# Altium PCB Kocka_BDD.PcbDoc
Units mm, origin at the board's own origin, x right, y up, seen from the top; angles counter-clockwise.
Board outline 50 x 50 mm, 2 copper layers (Top Layer, Bottom Layer); 24 components, 42 nets, 109 pads, 51 vias.
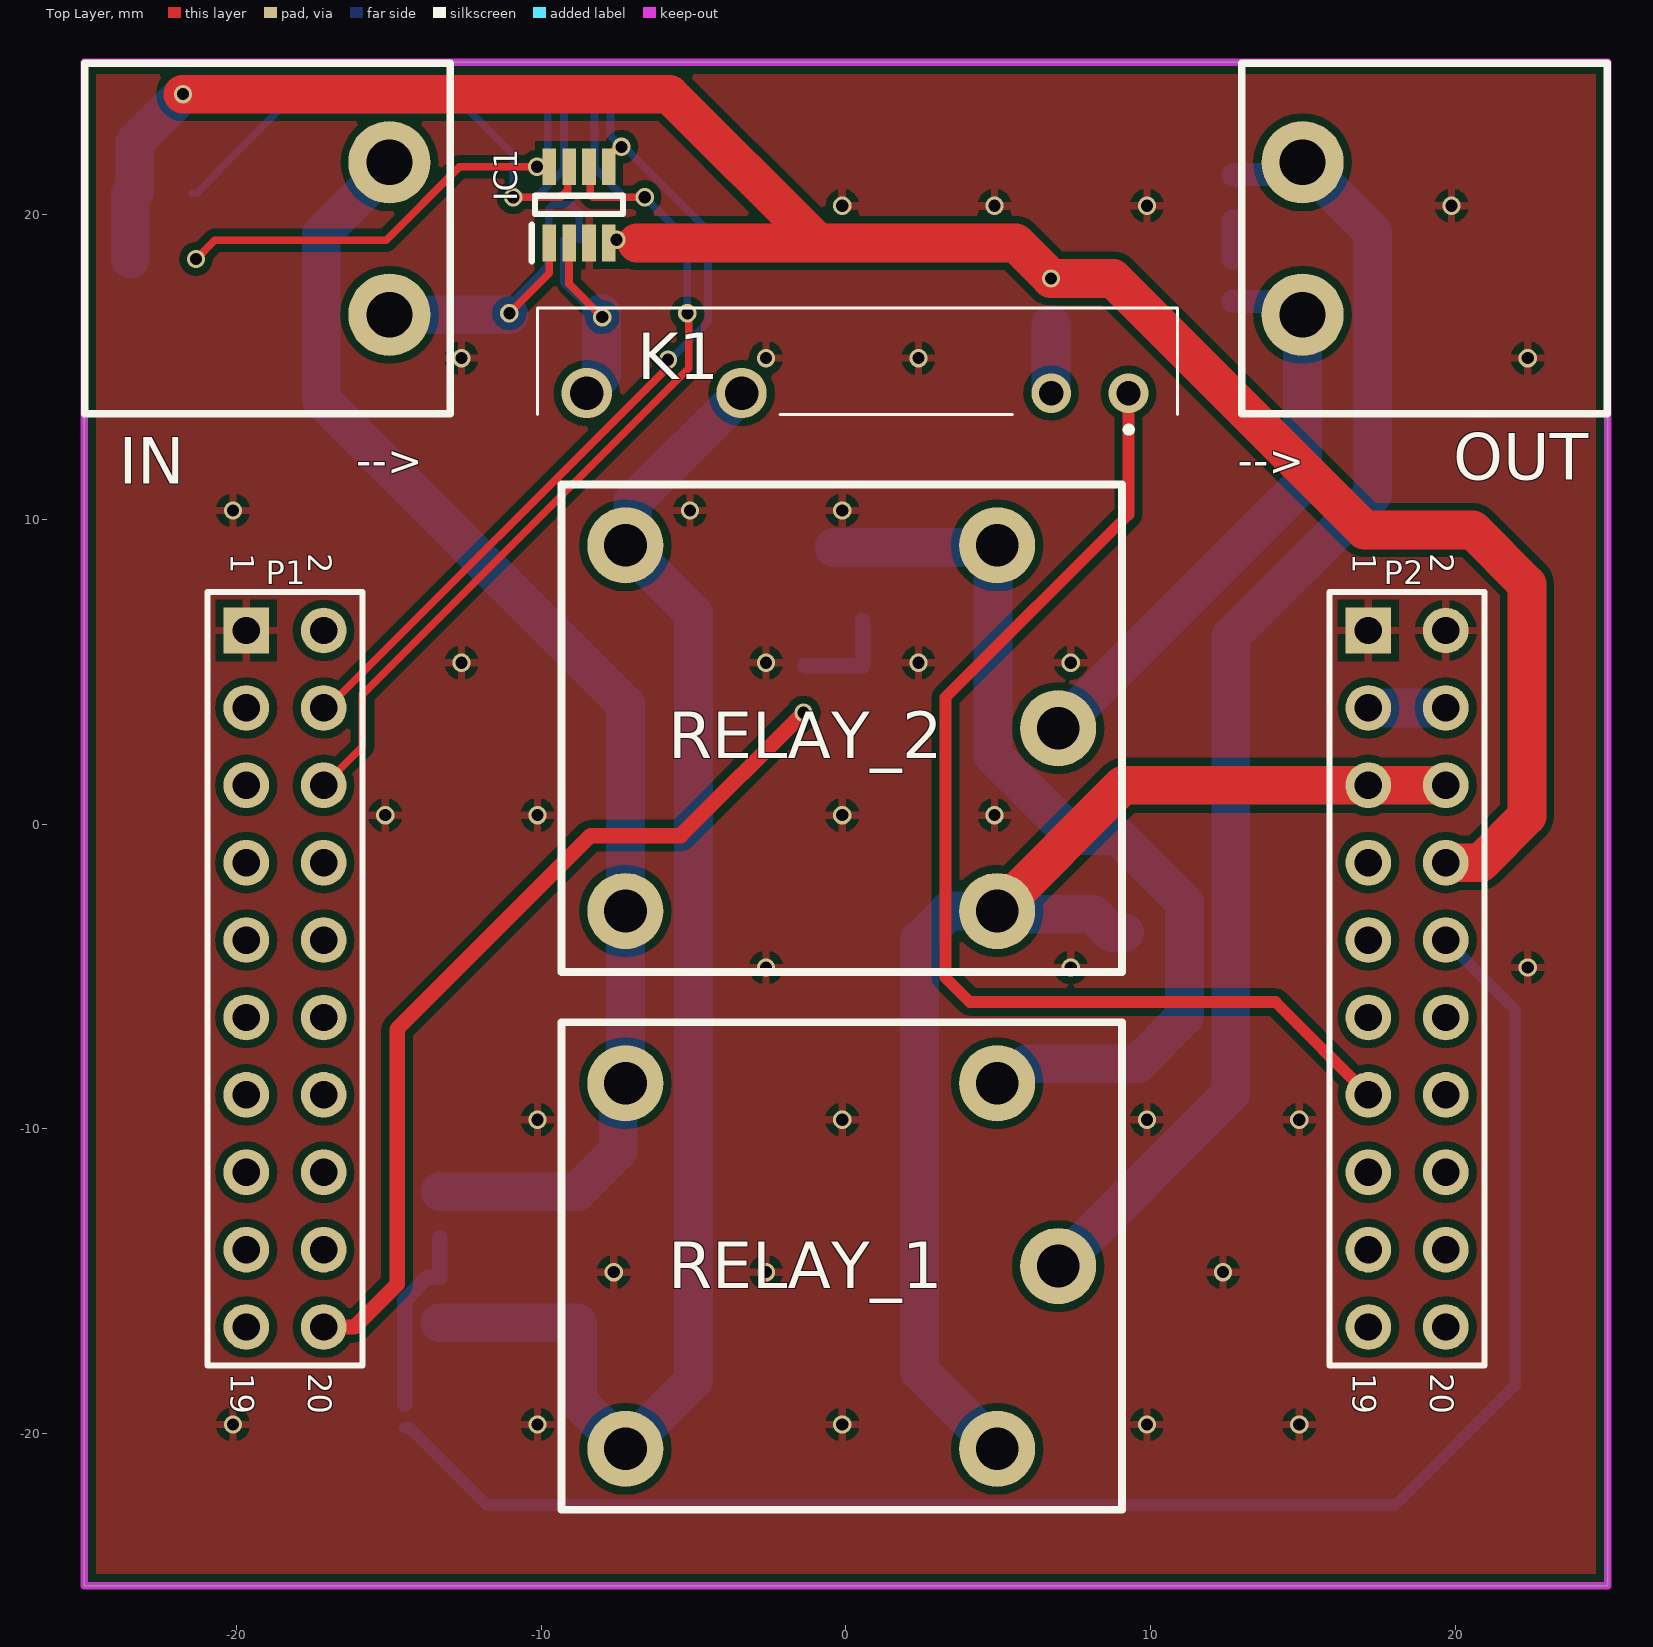
[diagram p0: Top Layer view]
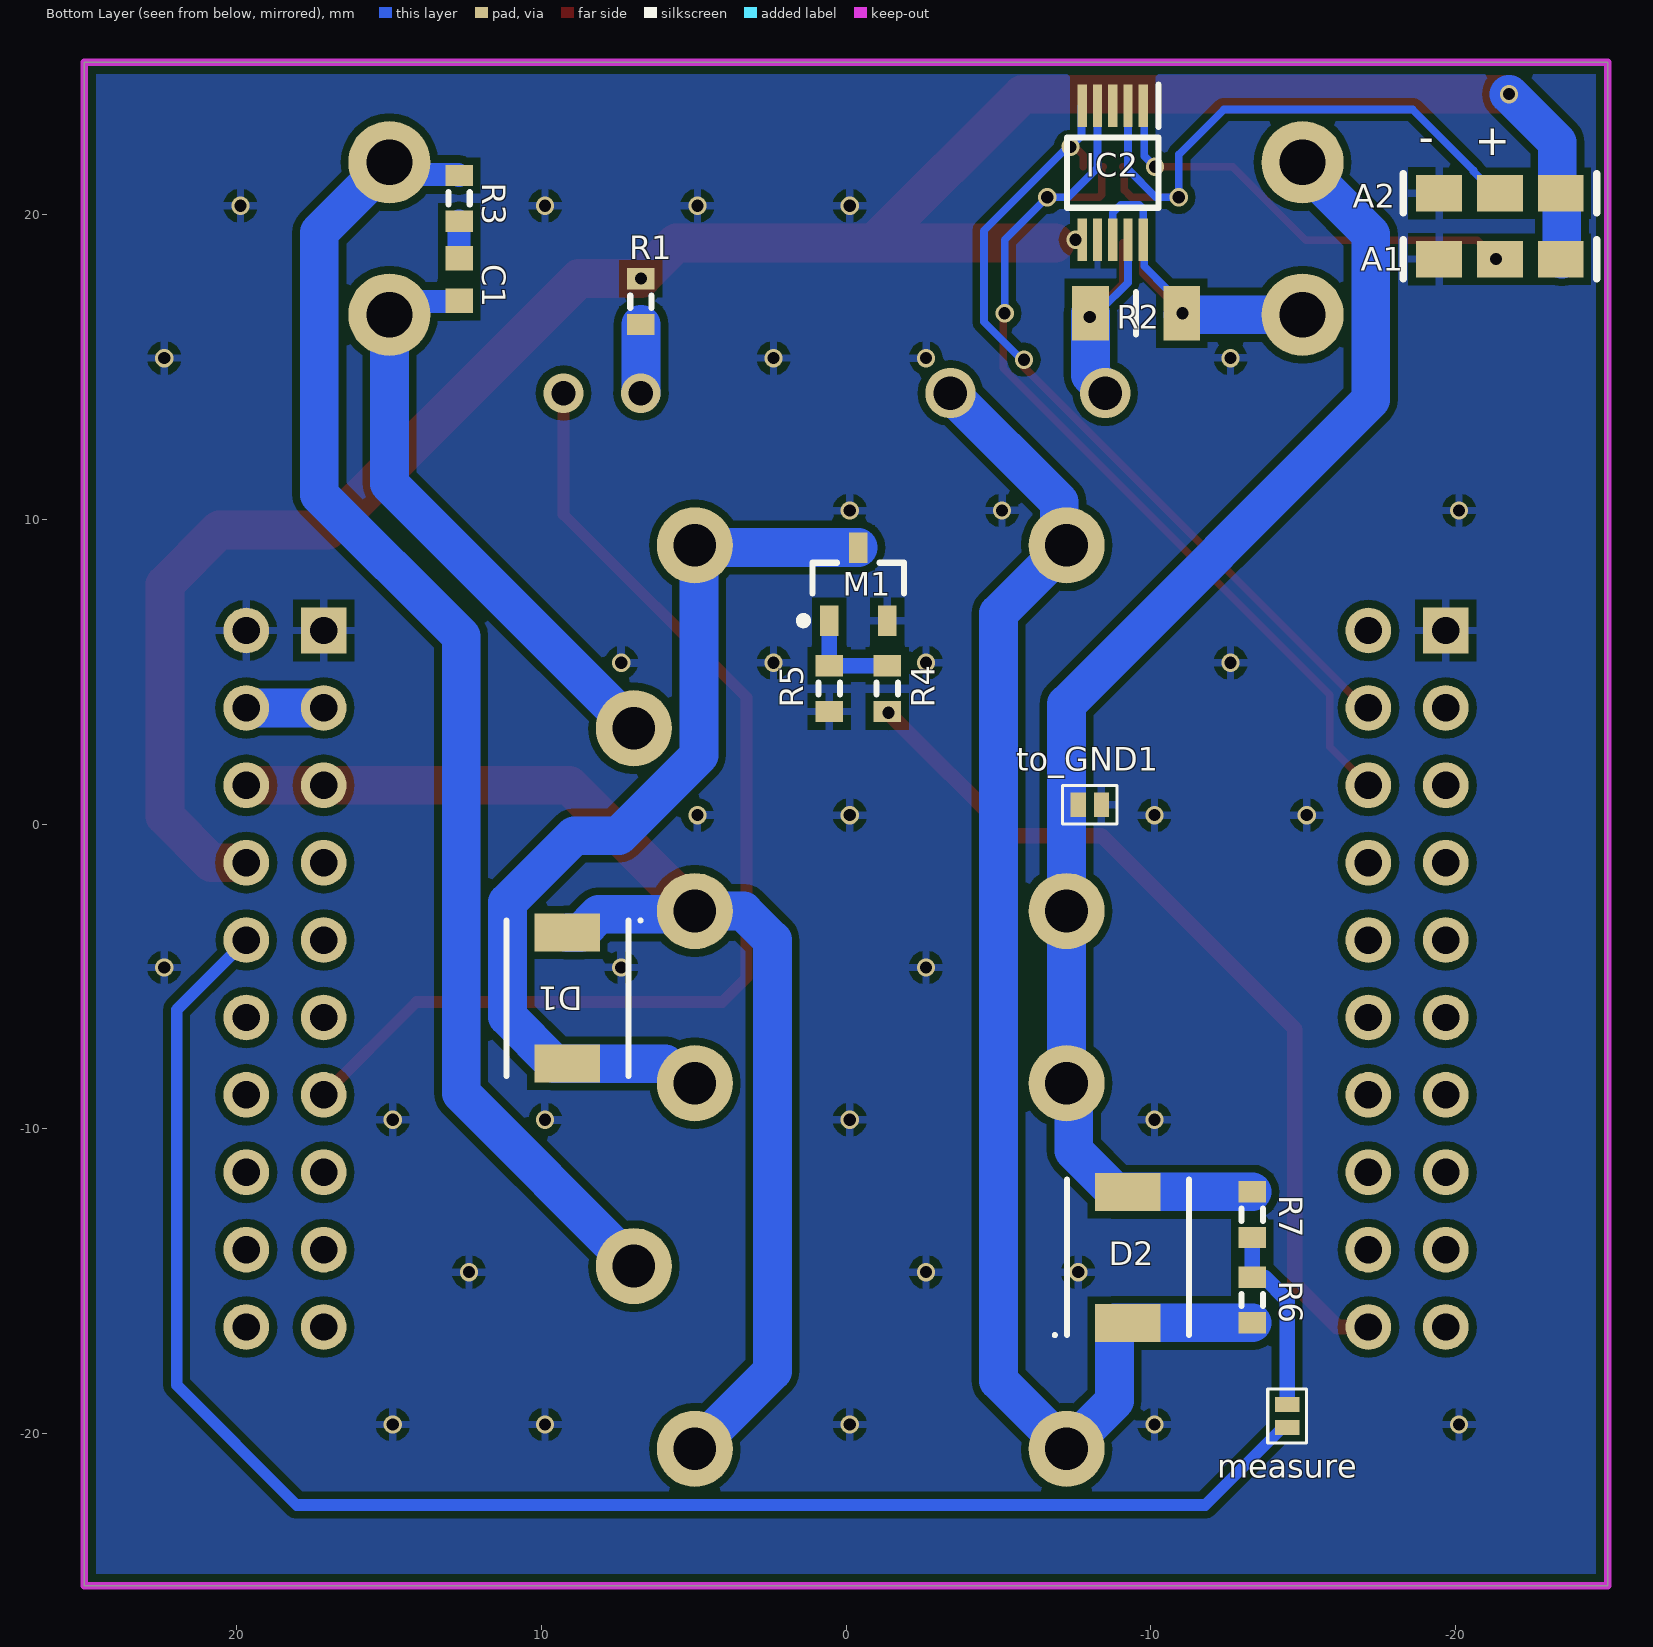
[diagram p1: Bottom Layer view, seen from below]
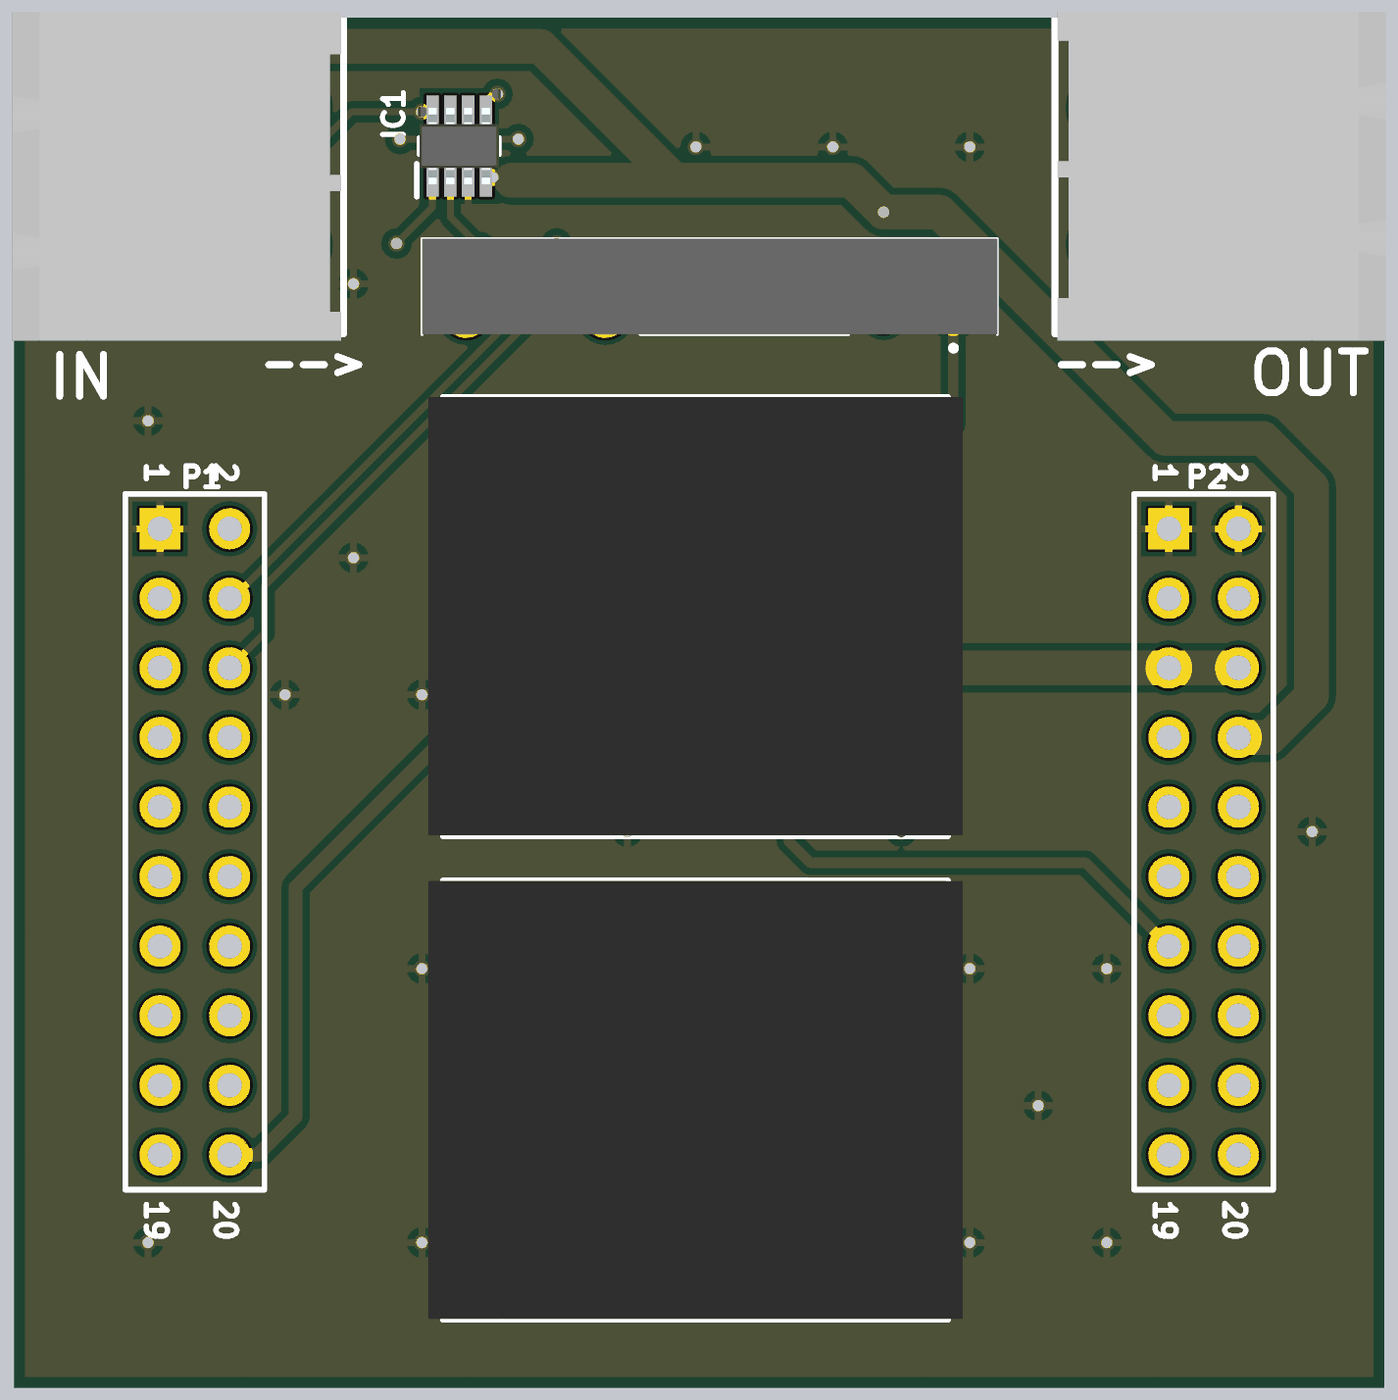
[diagram p2: 3D render of the assembled board from above, using the file's embedded part models]

## Layer stack, top to bottom
Top Solder: solder mask 0.0102, Solder Resist, Dk 3.5
Top Layer: signal copper 0.0356
Dielectric 1: dielectric 0.32, FR-4, Dk 4.8
Bottom Layer: signal copper 0.0356
Bottom Solder: solder mask 0.0102, Solder Resist, Dk 3.5

## Board outline
-25,-25 25,-25 25,25 -25,25

## Design rules (kind name [scope] priority, off if disabled: settings)
Clearance [All] p1: gap=0.254 ignorepadtopadclearanceinfootprint=TRUE except(0: Arc-Hole Track-Hole SMDPad-Hole THPad-Hole Via-Hole Fill-Hole Poly-Hole Region-Hole Text-Hole; 0.127: Arc-Arc Arc-Track Track-Track SMDPad-SMDPad; 0.2: Arc-SMDPad Arc-THPad Track-SMDPad Track-THPad)
HoleSize [All] p1: absolutevalues=TRUE maxlimit=10 minlimit=0.2 maxpercent=80.000 minpercent=20.000
PolygonConnect [All] p1: connectstyle=Relief reliefconductorwidth=0.254 reliefentries=4 polygonreliefangle="90 Angle" airgapwidth=0.254
RoutingVias [All] p1: holewidth=0.4 width=0.6 viastyle="Through Hole" minholewidth=0.2 minwidth=0.4 maxholewidth=6 maxwidth=10
SolderMaskExpansion [All] p1: expansion=0.102
Width [All] p1: maxlimit=12.7 minlimit=0.089 preferedwidth=0.254
29 further rules are at their usual default settings.

## Classes and differential pairs
component class Meranie: A1 A2 IC1 IC2 R2
component class "Duty cycle SSR": K1 K? R1
component class Kocka_BDD: IN OUT P1 P2
component class "Zmena polarity": C1 D1 D2 K? M1 measure R3 R4 R5 R6 R7 RELAY_1 RELAY_2 to_GND1

## Components (designator, comment, footprint, x,y, rotation, side; value= is the part's Value field where it differs from the comment)
A1 "ADR_PAD" SOLDER_PAD -21.463,18.542 r90 bottom
A2 "ADR_PAD" SOLDER_PAD -21.463,20.701 r90 bottom
C1 "100nF" 1608[0603] 12.7,17.87 r270 bottom value=100pF
D1 "SK52-DIO" D5A20V 9.144,-5.715 r270 bottom
D2 "SS14" D5A20V -9.255,-14.224 r90 bottom
IC1 "INA219AIDCNR" SOT65P280X145-8N -8.763,20.32 r90 top
IC2 "INA226AIDGSR" SOP50P490X110-10N -8.755,21.377 r270 bottom
IN "B+,A-" CON_2CH_PLUG -14.986,19.217 r270 top
K1 "AQZ102" AQZ102 0.381,16.944 r180 top
M1 "NMOS" SOT23 -0.402,7.874 r90 bottom
measure "JMP" JMP -14.478,-19.431 r270 bottom
OUT "B+,A-" CON_2CH_PLUG 14.986,19.217 r90 top
P1 "Header 10X2" HDR2X10 -19.685,6.35 r270 top
P2 "Header 10X2" HDR2X10 17.145,6.35 r270 top
R1 "220 Ohm" J1-0603 6.731,17.145 r270 bottom value=10K
R2 "2mOhm" RESC3216X75N -9.525,16.764 r180 bottom
R3 "15R" J1-0603 12.7,20.537 r270 bottom value=2R
R4 "5R" J1-0603 -1.352,4.445 r90 bottom value=200K
R5 "100K" J1-0603 0.548,4.445 r270 bottom value=200K
R6 "100K" J1-0603 -13.335,-15.624 r90 bottom value=200K
R7 "8K" J1-0603 -13.335,-12.824 r90 bottom value=200K
RELAY_1 "RELAY_DC" RELAY_DC 6.961,-14.509 r180 top
RELAY_2 "RELAY_DC" RELAY_DC 6.961,3.144 r180 top
to_GND1 "JMP" JMP -8.001,0.635 r180 bottom

## Footprints (in the part's own frame and the unit in brackets; to place one, negate y for a bottom-side part, rotate by r counter-clockwise, add the part's x,y. Pads: shape width x height; smd on the part's side, far side on the other; paste and mask are expansions set on the pad)
1608[0603] [mm] "Chip Capacitor, Body 1.6x0.8mm, IPC High Density"
  rect 0.8x0.9 smd: 1(-0.7,0) 2(0.7,0)
  body extent -0.87,-0.48 0.87,0.48, height 1.3
AQZ102 [mm]
  round 1.3 hole 0.8: 1(-8.89,2.8) 2(-6.35,2.8)
  round 1.65 hole 1.1: 3(3.81,2.8) 4(8.89,2.8)
  silkscreen extent -10.5,0 10.5,4.1, body extent -10.5,0 10.5,3.5, height 11.1
CON_2CH_PLUG [mm] "TBG-5.0-KW-2P"
  round 2.7 hole 1.5: 1(-2.5,0) 2(2.5,0)
  silkscreen extent -5.75,-10 5.75,2, body extent -6,-10.09 6,1.91, height 8.5
D5A20V [mm] "Schottky 5A 20V"
  rect 1.25x2.15 smd: 1(-2.15,0) 2(2.15,0)
  silkscreen extent -2.6,-2 2.55,2.45, body extent -2.7,-2 2.7,2, height 2.4
HDR2X10 [mm] "Connector; Header; 10x2 Position"
  rect 1.5x1.5 hole 0.9: 1(0,0)
  round 1.5 hole 0.9: 2(0,2.54) 3(2.54,0) 4(2.54,2.54) 5(5.08,0) 6(5.08,2.54) 7(7.62,0) 8(7.62,2.54) 9(10.16,0) 10(10.16,2.54) 11(12.7,0) 12(12.7,2.54) 13(15.24,0) 14(15.24,2.54) 15(17.78,0) 16(17.78,2.54) 17(20.32,0) 18(20.32,2.54) 19(22.86,0) 20(22.86,2.54)
  silkscreen extent -1.27,-1.27 24.13,3.81
J1-0603 [mm] "Chip Resistor, Body 1.6x0.8mm, IPC High Density"
  rect 0.7x0.9 smd: 1(-0.75,0) 2(0.75,0)
  silkscreen extent -0.2,-0.35 0.2,0.35, body extent -0.85,-0.48 0.85,0.48, height 0.9
JMP [mm] "Jumper_solder"
  rect 0.5x0.8 smd: 1(-0.381,0) 2(0.381,0)
  silkscreen extent -0.89,-0.64 0.89,0.64
RELAY_DC [mm] "RM51-3011-85-1005"
  round 2.5 hole 1.4: 1(0,0) 2(2,6) 3(14.2,6) 4(14.2,-6) 5(2,-6)
  silkscreen extent -2.1,-8 16.3,8, body extent -2.65,-8.01 16.85,7.99, height 17.5
RESC3216X75N [mm]
  rect 1.2x1.8 smd: 1(-1.5,0) 2(1.5,0)
  silkscreen extent 0,-0.7 0,0.7, body extent -1.6,-0.8 1.6,0.8, height 0.75
SOLDER_PAD [mm]
  rect 1.2x1.5 smd: 1(0,2) 2(0,0) 3(0,-2)
  silkscreen extent -0.64,-3.17 0.64,3.17
SOP50P490X110-10N [mm]
  rect 1.4x0.3 smd: 1(-2.2,1) 2(-2.2,0.5) 3(-2.2,0) 4(-2.2,-0.5) 5(-2.2,-1) 6(2.2,-1) 7(2.2,-0.5) 8(2.2,0) 9(2.2,0.5) 10(2.2,1)
  silkscreen extent -2.9,-1.5 1.15,1.5, body extent -2.45,-1.5 2.45,1.5, height 1.1
SOT23 [mm] "SOT23, 3-Leads, Body 2,56x2,37mm, Pitch 0,95mm, IPC Medium Density"
  rect 1x0.6 smd: 1(-1.2,0.95) 2(-1.2,-0.95) 3(1.2,0)
  silkscreen extent -1.32,-1.5 0.7,1.93, body extent -1.32,-1.52 1.32,1.52, height 1.12
SOT65P280X145-8N [mm]
  rect 1.2x0.45 smd: 1(-1.25,0.975) 2(-1.25,0.325) 3(-1.25,-0.325) 4(-1.25,-0.975) 5(1.25,-0.975) 6(1.25,-0.325) 7(1.25,0.325) 8(1.25,0.975)
  silkscreen extent -1.85,-1.45 0.3,1.55, body extent -1.4,-1.45 1.4,1.45, height 1.45

## Part data
A1 A2: "ADR PAD 3 PIN"
C1: library part "Cap Semi", "Capacitor (Semiconductor SIM Model)", LatestRevisionDate=29-May-2009, LatestRevisionNote="IPC-7351 Footprint Added.", PackageDescription="Chip Capacitor", PackageReference=C1206, Published=8-Jun-2000, Publisher="Altium Limited"
D1 D2: library part D_5A_20V
IC1: library part INA219BIDCNR, "Integrated Circuit", Manufacturer_Name="Texas Instruments", Mouser Part Number=595-INA219BIDCNR, Datasheet Link=http://www.ti.com/lit/ds/symlink/ina219.pdf, Height=1.45mm, Manufacturer_Part_Number=INA219BIDCNR, Mouser Price/Stock=https://www.mouser.com/Search/Refine.aspx?Keyword=595-INA219BIDCNR
IC2: "Integrated Circuit", Manufacturer_Name="Texas Instruments", Mouser Part Number=595-INA226AIDGSR, Arrow Part Number=INA226AIDGSR, Arrow Price/Stock=https://www.arrow.com/en/products/ina226aidgsr/texas-instruments, Datasheet Link=https://componentsearchengine.com/Datasheets/1/INA226AIDGSR.pdf, Height=1.1mm, Manufacturer_Part_Number=INA226AIDGSR, Mouser Price/Stock=https://www.mouser.co.uk/ProductDetail/Texas-Instruments/INA226AIDGSR?qs=tQG3bEuiOZD4quG3egR36g%3D%3D
IN OUT: library part CON_2CH_PLUG, "TBG-5.0-KW-2P"
K1: "Relay or Contactor", Manufacturer_Name=Panasonic, Mouser Part Number=769-AQZ102, Arrow Part Number=AQZ102, Arrow Price/Stock=https://www.arrow.com/en/products/aqz102/panasonic, Datasheet Link=https://industrial.panasonic.com/ac/cdn/e/control/relay/photomos/catalog/semi_eng_pwr1a_aqz10_20.pdf, Height=11mm, Manufacturer_Part_Number=AQZ102, Mouser Price/Stock=https://www.mouser.co.uk/ProductDetail/Panasonic-Industrial-Devices/AQZ102?qs=tR16lFwwUU%2FVYpsj8M3w%252BA%3D%3D
M1: Supplier Part Number 1=1857299, Supplier 1=Farnell
P1 P2: "Header, 10-Pin, Dual row", LatestRevisionDate=17-Jul-2002, LatestRevisionNote="Re-released for DXP Platform.", Publisher="Altium Limited"
R1 R2 R3 R4 R5 R6 R7: library part Res3, "Resistor", LatestRevisionDate=29-May-2009, LatestRevisionNote="IPC-7351 Footprint Added.", PackageDescription="Chip Resistor", PackageReference=J1-0603, Published=8-Jun-2000, Publisher="Altium Limited"
RELAY_1 RELAY_2: "RM51-3011-85-1005"

## Via types
v1: diameter 0.6, hole 0.4, Top Layer to Bottom Layer, tented both sides, 47 vias
v2: diameter 1.3, hole 0.8, Top Layer to Bottom Layer, tented both sides, 2 vias
v3: diameter 1.65, hole 1.1, Top Layer to Bottom Layer, tented both sides, 2 vias

## Nets (pads, with @x,y where several pads share a name; then routed paths per layer and width w, separated by ;. In a path a pad name is that pad's centre, name@x,y a point inside that pad or via, vN(x,y) a via of type N, cw(c..) or ccw(c..) an arc to the next point about the centre after c; other vN are vias at no path point)
3V3: A1.3 A2.3 IC1.4 IC2.6 P2.8 R1.1 | length 74.2
  Top Layer w0.508: -7.239,19.07 -6.858,19.07
  Top Layer w1.27: v1(-21.764,23.956) -5.795,23.956 -0.909,19.07 ; -6.858,19.07 -0.909,19.07 ; P2.8 20.828,-1.27 22.352,0.254 22.352,7.874 20.574,9.652 17.018,9.652 8.763,17.907 v1(6.731,17.907) 5.568,19.07 -0.909,19.07
  Bottom Layer w1.27: A1.3@-23.495,18.542 A2.3@-23.495,20.701 ; A2.3 -23.383,20.701 -23.348,20.736 -23.348,22.372 v1(-21.764,23.956)
  other v1: -7.534,19.177
5V: D1.1 P2.5 P2.6 RELAY_1.2 RELAY_2.2 | length 41.6
  Top Layer w1.27: RELAY_2.2 9.087,1.27 P2.5 P2.6
  Bottom Layer w1.27: RELAY_1.2 2.413,-17.961 2.413,-3.81 3.367,-2.856 RELAY_2.2 5.072,-2.967 8.116,-2.967 8.714,-3.565 D1.1
ADR0_1: A2.2 IC1.7 IC2.2 | length 20.5
  Top Layer w0.254: v1(-10.922,20.574) -9.37,20.574 -9.132,20.812 -9.132,21.526 IC1.7
  Bottom Layer w0.254: A2.2 -21.313,20.701 -20.594,21.42 -20.594,21.459 -18.605,23.448 -12.399,23.448 -10.922,21.971 v1(-10.922,20.574) -10.167,20.574 -9.255,21.486 IC2.2
ADR1_1: A1.2 IC1.8 IC2.1 | length 14.7
  Top Layer w0.254: v1(-21.336,18.542) -20.719,19.159 -15.095,19.159 -12.685,21.57 v1(-10.14,21.57)
  Bottom Layer w0.254: A1.2 v1(-21.336,18.542) ; v1(-10.14,21.57) -9.786,21.924 IC2.1@-9.786,23.577
BDD1_INA_+: IC1.1 IC2.8 IC2.10 IN.2 R2.2 | length 12.5
  Top Layer w0.254: v1(-11.049,16.764) -9.738,18.075 IC1.1
  Bottom Layer w0.254: R2.2@-11.025,17.053 -10.552,17.526 -10.552,17.537 -9.786,18.303 IC2.10@-9.786,19.177 ; IC2.10 -9.755,20.193 -9.62,20.328 -9.017,20.328 -8.755,20.066 IC2.8
  Bottom Layer w1.27: IN.2 R2.2@-11.06,16.717
BDD1_INA_-: IC1.2 IC2.9 K1.4 R2.1 | length 8.4
  Top Layer w0.254: IC1.2 -9.088,17.724 v1(-8.001,16.637)
  Bottom Layer w0.254: IC2.9 -9.255,17.764 R2.1@-8.382,16.891
  Bottom Layer w1.27: v3(-8.509,14.144) -8.509,14.246 -8.025,14.73 R2.1
BDD_1_DUTY_CYCLE: K1.1 P2.13 | length 37.1
  Top Layer w0.381: v2(9.271,14.144) 9.271,10.16 3.266,4.155 3.266,-5.044 4.064,-5.842 14.097,-5.842 P2.13
GND: A1.1 A2.1 IC1.3 IC2.7 M1.2 P1.1 P2.1 P2.2 R5.2 to_GND1.2
  other v1: -20.123,-19.709 -10.123,-19.709 -0.123,-19.709 9.877,-19.709 14.877,-19.709 -7.623,-14.709 -2.623,-14.709 12.377,-14.709 -10.123,-9.709 -0.123,-9.709 9.877,-9.709 14.877,-9.709 -2.623,-4.709 7.377,-4.709 22.377,-4.709 -15.123,0.291 -10.123,0.291 -0.123,0.291 4.877,0.291 -12.623,5.291 -2.623,5.291 2.377,5.291 7.377,5.291 -20.123,10.291 -5.123,10.291 -0.123,10.291 -12.623,15.291 -2.623,15.291 2.377,15.291 22.377,15.291 -0.123,20.291 4.877,20.291 9.877,20.291 19.877,20.291
IN+_BDD_1: D2.1 K1.3 R6.1 RELAY_1.3 RELAY_2.4 | length 47.4
  Bottom Layer w1.27: R6.1 D2.1 -8.825,-16.374 -8.815,-16.384 -8.815,-18.933 RELAY_1.3 -5.008,-18.278 -5.008,6.913 RELAY_2.4 -7.004,9.379 -7.004,10.569 v3(-3.429,14.144)
IN-_BDD_1: D2.2 IN.1 R7.2 RELAY_1.4 RELAY_2.3 to_GND1.1 | length 44
  Bottom Layer w1.27: IN.1 -14.986,21.592 -17.225,19.353 -17.225,13.923 -7.239,3.937 -7.239,0.635 RELAY_2.3 RELAY_1.4 -7.474,-8.744 -7.474,-10.723 -8.825,-12.074 D2.2 R7.2
Measuring_voltage_1: measure.2 P2.10 | length 54.7
  Bottom Layer w0.381: measure.2 -14.328,-19.812 -11.788,-22.352 18.034,-22.352 21.971,-18.415 21.971,-6.096 P2.10
NetC1_1: C1.1 R3.2 | length 1.2
  Bottom Layer w0.762: C1.1 R3.2
NetK1_2: K1.2 R1.2 | length 2.3
  Bottom Layer w1.27: v2(6.731,14.144) R1.2
NetM1_1: M1.1 R4.2 R5.1 | length 3.4
  Bottom Layer w0.508: R4.2 R5.1 M1.1
Netmeasure_1: measure.1 R6.2 R7.1 | length 6.2
  Bottom Layer w0.508: measure.1 -14.478,-15.621 -13.731,-14.874 R6.2 R7.1
NRST: P2.3 P2.4 | length 2.5
  Bottom Layer w1.27: P2.3 P2.4
OUT_1_BDD_1: OUT.2 R3.1 RELAY_1.1 | length 43.9
  Bottom Layer w0.762: R3.1 12.731,21.318 14.062,21.318 14.462,21.717 OUT.2
  Bottom Layer w1.27: RELAY_1.1 12.632,-8.838 12.632,6.155 17.288,10.811 17.288,19.415 OUT.2
OUT_2_BDD_1: C1.2 OUT.1 RELAY_2.1 | length 19.4
  Bottom Layer w0.762: C1.2 12.719,17.151 14.028,17.151 14.462,16.717 OUT.1
  Bottom Layer w1.27: RELAY_2.1 14.986,11.169 OUT.1
PA0: P2.19
PA1: P2.17
PA2: P2.15
PA4: P2.11
PA5: P2.9
PA6: P2.7
PA8: P1.2
PA9_SCL: IC1.5 IC2.5 P1.4 | length 27.4
  Top Layer w0.254: P1.4 -17.027,3.81 -5.842,14.995 v1(-5.842,15.24) ; IC1.5 -7.788,21.945 -7.574,22.159 -7.432,22.159 v1(-7.366,22.225)
  Bottom Layer w0.254: IC2.5 -7.732,23.554 -7.732,22.591 v1(-7.366,22.225) -7.283,22.225 -4.526,19.468 -4.526,16.482 -5.768,15.24 v1(-5.842,15.24)
PA10_SDA: IC1.6 IC2.4 P1.6 | length 31.7
  Top Layer w0.254: P1.6 -15.875,2.54 -15.875,4.244 -5.161,14.958 -5.161,16.718 v1(-5.207,16.764) ; IC1.6 -8.394,21.526 -8.394,20.664 -8.304,20.574 v1(-6.605,20.574)
  Bottom Layer w0.254: IC2.4 -8.255,21.543 -7.286,20.574 v1(-6.605,20.574) -5.207,19.176 v1(-5.207,16.764)
PA11: P1.8
PA12: P1.10
PA13: P1.12
PA14: P1.14
PA15: P1.16
PB0: P1.3
PB1: P1.5
PB3: P1.18
PB4: P1.20 R4.1 | length 29.1
  Top Layer w0.508: P1.20 -16.129,-16.51 -14.732,-15.113 -14.732,-6.731 -8.382,-0.381 -5.428,-0.381 v1(-1.397,3.65)
  Bottom Layer w0.508: v1(-1.397,3.65) R4.1
PB5: P1.19
PB6_TX: P2.20
PB7_RX: P2.18
PC14: P2.16
PC15: P2.14
RELE_1: D1.2 M1.3 RELAY_1.5 RELAY_2.5 | length 31.3
  Bottom Layer w1.27: M1.3 RELAY_2.5@4.891,9.074 ; RELAY_1.5 5.294,-8.509 5.938,-7.865 D1.2 9.574,-7.865 11.108,-6.331 11.108,-2.572 8.917,-0.381 7.461,-0.381 4.822,2.258 4.822,9.005 RELAY_2.5@4.891,9.074 ; RELAY_2.5 RELAY_2.5@4.891,9.074
pads on no net: IC2.3 P1.7 P1.9 P1.11 P1.13 P1.15 P1.17 P2.12

## Polygon pours and split planes (outlines as drawn)
GND on Bottom Layer "Bottom Layer-GND" (solid, pour order 0): -25,-25 -25,25 25,25 25,-25
GND on Top Layer "Top Layer-GND" (solid, pour order 2): -25,-25 25,-25 25,25 -25,25

## Keep-outs
Keep-Out Layer:
  the board outline again, w0.254

## Silkscreen, mask and mechanical layers (free items; w line width, h text height)
Top Overlay:
  text "-->" at -16.075,11.43 h1.02
  text "-->" at 12.859,11.43 h1.02
Bottom Overlay:
  text "-   +" at -18.796,22.82 h1.02 r180

## Text inside footprints (layer, text, board x,y; h text height)
P1: Top Overlay "2" at -17.653,8.89 h0.76 r270; Top Overlay "1" at -20.193,8.89 h0.76 r270; Top Overlay "19" at -20.193,-18.034 h0.76 r270; Top Overlay "20" at -17.653,-18.034 h0.76 r270
P2: Top Overlay "2" at 19.177,8.89 h0.76 r270; Top Overlay "1" at 16.637,8.89 h0.76 r270; Top Overlay "19" at 16.637,-18.034 h0.76 r270; Top Overlay "20" at 19.177,-18.034 h0.76 r270